# Altium PCB 01LED灯模块.PcbDoc
Units mil, origin at the board's own origin, x right, y up, seen from the top; angles counter-clockwise.
Board outline 1168.96 x 939.58 mil, 2 copper layers (Top Layer, Bottom Layer); 1 components, 6 nets, 9 pads, 27 vias.
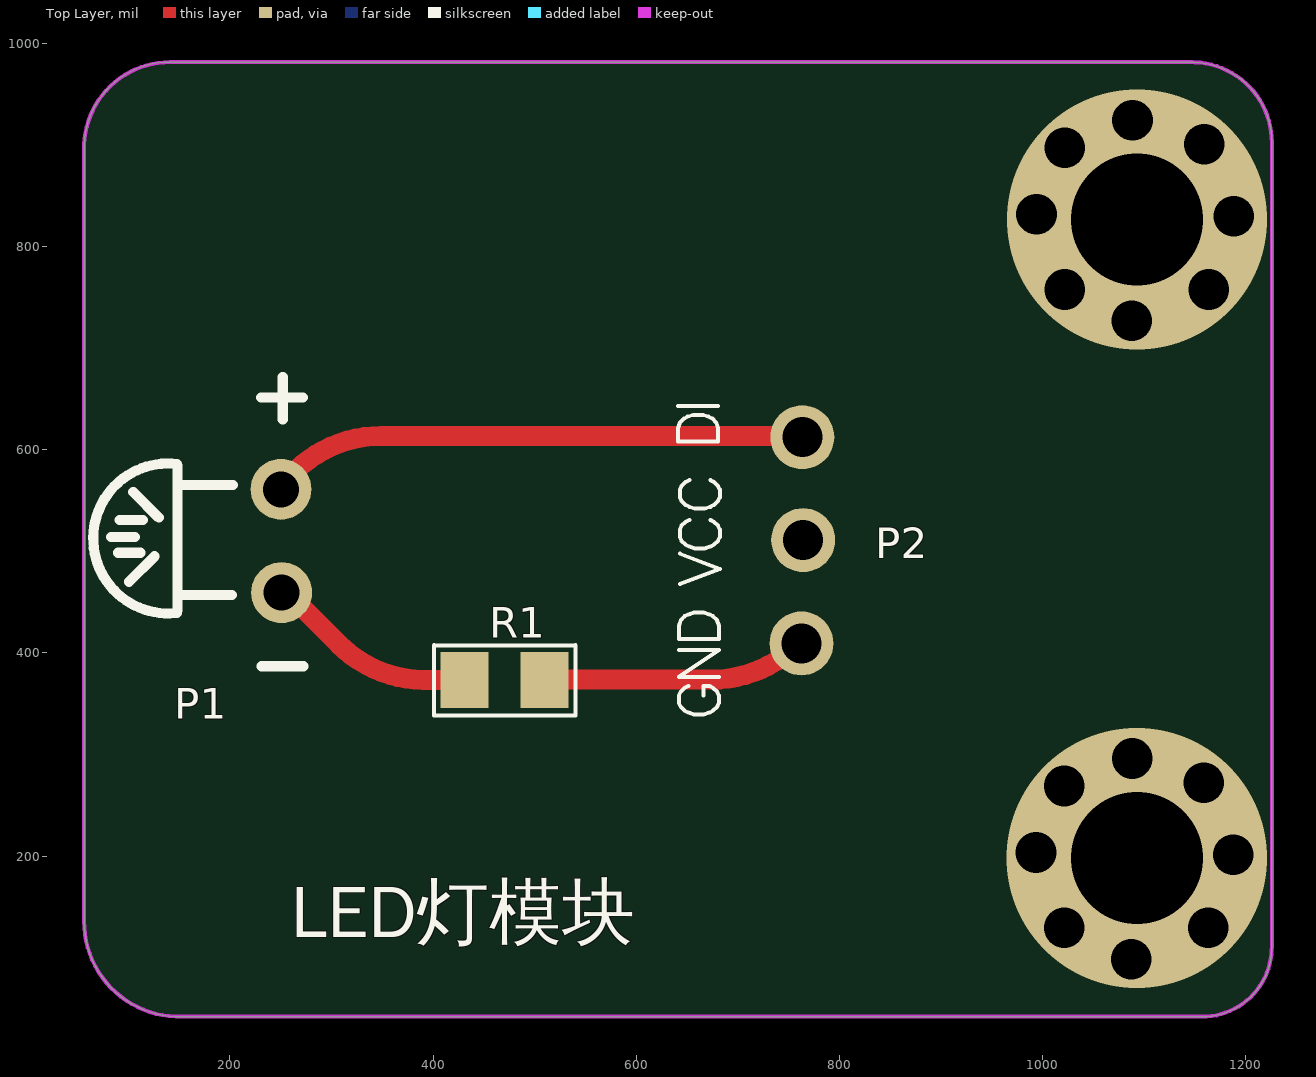
[diagram p0: Top Layer view]
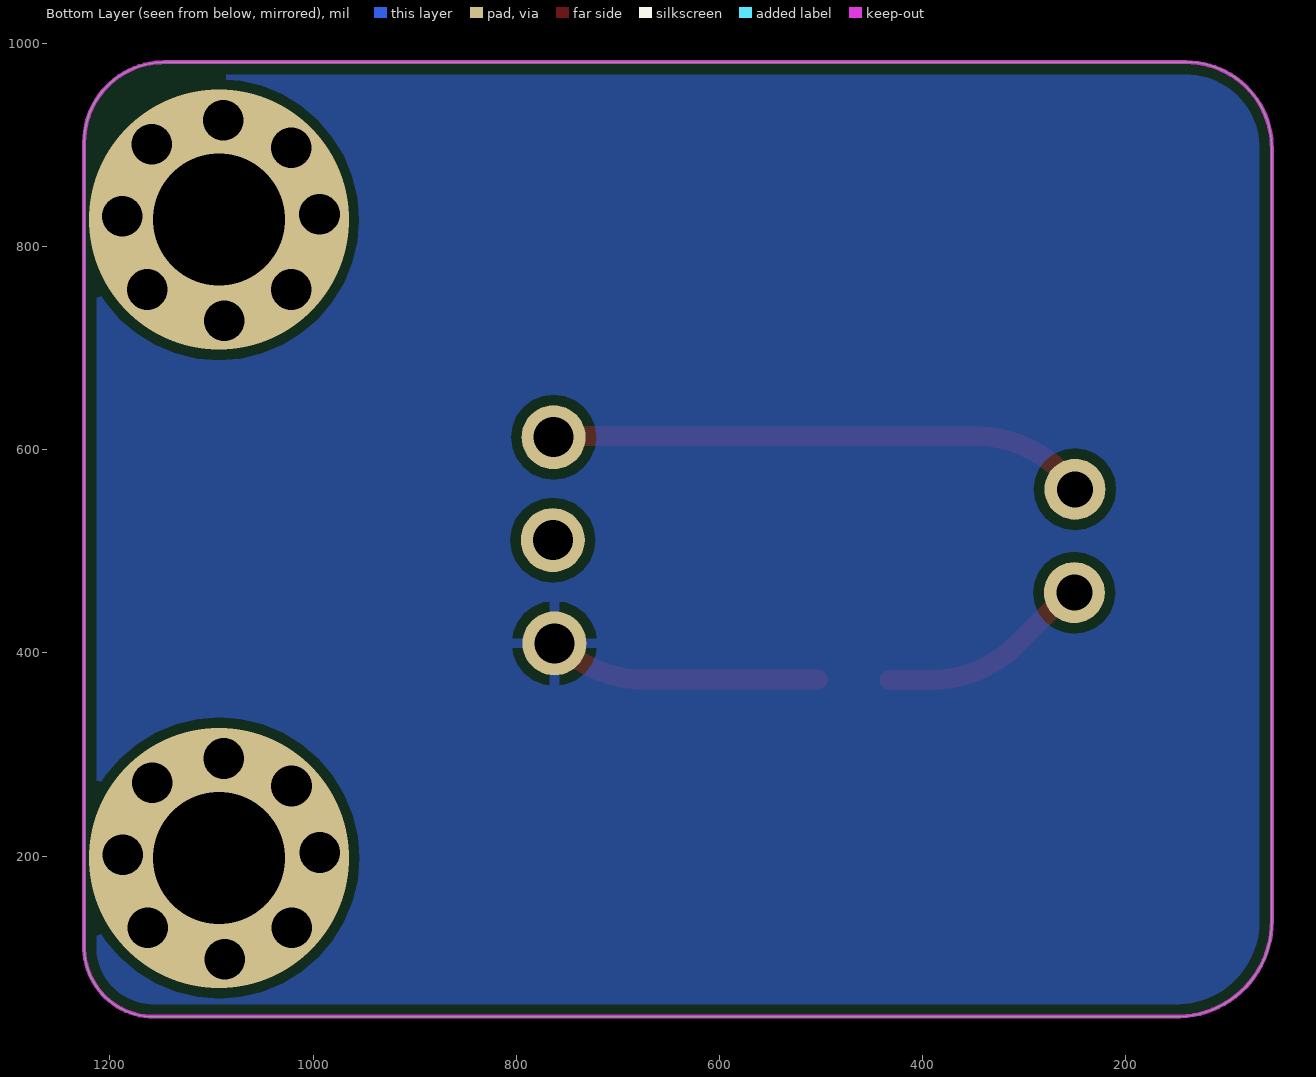
[diagram p1: Bottom Layer view, seen from below]

## Layer stack, top to bottom
Top Solder: solder mask 0.4, Solder Resist, Dk 3.5
Top Layer: signal copper 1.4
Dielectric1: dielectric 12.6, FR-4, Dk 4.8
Bottom Layer: signal copper 1.4
Bottom Solder: solder mask 0.4, Solder Resist, Dk 3.5

## Board outline
70.57,86.17 67.32,91.85 64.47,97.74 62.03,103.82 60.03,110.06 58.47,116.42 57.35,122.87 56.69,129.38 56.48,135.93 56.48,897.32 56.54,900.25 56.97,906.12 57.81,911.95 59.05,917.71 60.69,923.36 62.73,928.88 65.14,934.25 67.92,939.44 71.06,944.42 74.53,949.18 78.33,953.67 82.43,957.89 86.82,961.82 91.47,965.43 96.36,968.7 101.47,971.63 106.77,974.19 112.24,976.38 117.84,978.18 123.56,979.59 129.36,980.59 135.22,981.18 141.1,981.37 140.82,981.34 1146.68,981.34 1146.94,981.26 1149.69,981.2 1155.17,980.8 1160.61,980.02 1165.99,978.86 1171.27,977.32 1176.42,975.43 1181.44,973.17 1186.29,970.58 1190.94,967.65 1195.37,964.4 1199.57,960.86 1203.52,957.02 1207.18,952.93 1210.55,948.58 1213.61,944.02 1216.34,939.25 1218.74,934.3 1220.78,929.19 1222.46,923.96 1223.77,918.62 1224.71,913.2 1225.27,907.73 1225.44,902.24 1225.44,110.16 1225.38,107.76 1225.03,102.98 1224.35,98.24 1223.34,93.56 1222,88.97 1220.35,84.47 1218.39,80.11 1216.13,75.89 1213.58,71.83 1210.75,67.97 1207.66,64.31 1204.32,60.88 1200.75,57.69 1196.97,54.75 1192.99,52.09 1188.84,49.71 1184.53,47.63 1180.08,45.85 1175.52,44.38 1170.88,43.24 1166.16,42.43 1161.4,41.94 1156.61,41.79 1156.84,41.8 149.98,41.8 146.72,41.87 140.18,42.35 133.7,43.28 127.3,44.66 121.01,46.49 114.87,48.75 108.89,51.43 103.12,54.52 97.58,58.01 92.29,61.88 87.29,66.11 82.6,70.67 78.23,75.55 74.22,80.72

## Design rules (kind name [scope] priority, off if disabled: settings)
Clearance CAM_Clearance_2 [OnLayer('Top Layer')] p1: gap=10 ignorepadtopadclearanceinfootprint=FALSE except(0: Arc-Hole Track-Hole SMDPad-Hole THPad-Hole Via-Hole Fill-Hole Poly-Hole Region-Hole Text-Hole)
Clearance CAM_Clearance_1 [OnLayer('Bottom Layer')] p2: gap=10 ignorepadtopadclearanceinfootprint=FALSE except(0: Arc-Hole Track-Hole SMDPad-Hole THPad-Hole Via-Hole Fill-Hole Poly-Hole Region-Hole Text-Hole)
Clearance [All] p3: gap=10 ignorepadtopadclearanceinfootprint=FALSE except(0: Arc-Hole Track-Hole SMDPad-Hole THPad-Hole Via-Hole Fill-Hole Poly-Hole Region-Hole Text-Hole)
PolygonConnect [All] p1: connectstyle=Relief reliefconductorwidth=10 reliefentries=4 polygonreliefangle="90 Angle" airgapwidth=10
RoutingVias [All] p1: holewidth=28 width=50 viastyle="Through Hole" minholewidth=28 minwidth=50 maxholewidth=28 maxwidth=50
SilkToSolderMaskClearance SilkscreenOverComponentPads [IsPad] p1: minsilkscreentomaskgap=10 clearancetoexposedcopper=TRUE
SolderMaskExpansion [All] p1: expansion=4
Width CAM_Width_2 [OnLayer('Top Layer')] p1: maxlimit=20.68 minlimit=18.68 preferedwidth=19.68
Width CAM_Width_1 [OnLayer('Bottom Layer')] p2: maxlimit=11 minlimit=4 preferedwidth=5
Width [All] p3: maxlimit=10 minlimit=10 preferedwidth=10
29 further rules are at their usual default settings.

## Components (designator, comment, footprint, x,y, rotation, side; value= is the part's Value field where it differs from the comment)
R1 "100R 5%" 0805-R 470,373.43 r180 top

## Footprints (in the part's own frame and the unit in brackets; to place one, negate y for a bottom-side part, rotate by r counter-clockwise, add the part's x,y. Pads: shape width x height; smd on the part's side, far side on the other; paste and mask are expansions set on the pad)
0805-R [mm]
  rect 1.2x1.4 smd: 1(-1,0) 2(1,0)
  silkscreen extent -1.78,-0.86 1.75,0.89, body extent -0.97,-0.61 1.03,0.64, height 0.55

## Free pads (board coordinates)
  round 60 hole 35.43: 0(250.24,560.94) 0(250.85,459.26)
  rect 26x39.37 smd paste+0 mask+4: 1(432.53,373.43) 1(504,373.86)
  round 62.99 hole 39.37: 1(762.53,409.29) 1(763.35,612.2) 1(764.19,510.95)

## Via types
v1: diameter 40, hole 40, Top Layer to Bottom Layer, 24 vias
v2: diameter 255.91, hole 129.92, Top Layer to Bottom Layer, 3 vias

## Nets (pads, with @x,y where several pads share a name; then routed paths per layer and width w, separated by ;. In a path a pad name is that pad's centre, name@x,y a point inside that pad or via, vN(x,y) a via of type N, cw(c..) or ccw(c..) an arc to the next point about the centre after c; other vN are vias at no path point)
$Net0: pad.0@250.85,459.26 pad.1@432.53,373.43 R1.2 | length 209.1
  Top Layer w19.68: pad.0@253.78,458.85 253.9,458.85 254.39,458.82 254.88,458.76 255.35,458.67 255.83,458.54 256.29,458.39 256.74,458.19 257.17,457.97 257.59,457.72 257.99,457.44 258.37,457.13 258.73,456.8 306.96,408.57 313.12,402.82 319.67,397.52 326.57,392.69 333.79,388.35 341.3,384.53 349.05,381.23 357.02,378.49 365.16,376.31 373.43,374.7 381.79,373.68 390.2,373.24 392.31,373.22 R1.2@432.94,373.22
$Net1: pad.0@250.24,560.94 pad.1@763.35,612.2 | length 528
  Top Layer w19.68: pad.0@250.85,565.51 263.43,578.09 264.94,579.56 271.2,585.2 277.84,590.39 284.82,595.1 292.12,599.31 299.69,603 307.5,606.16 315.52,608.76 323.69,610.8 331.99,612.27 340.37,613.15 348.79,613.44 pad.1@764.19,613.44
$Net2: pad.1@504,373.86 pad.1@762.53,409.29 R1.1 | length 269.2
  Top Layer w19.68: R1.1@502.94,373.63 673.98,373.63 682.4,373.92 690.78,374.8 699.08,376.27 707.25,378.31 715.27,380.91 723.08,384.07 730.65,387.76 737.95,391.97 744.93,396.68 751.57,401.87 757.83,407.51 759.33,408.99 pad.1@761.69,411.34
$Net3: pad.1@764.19,510.95
$Net4: 
  other v1: 1087.11,98.43 1021.27,129.25 1162.93,129.25 1187.53,201.35 993.36,203.43 1021.28,268.85 1158.36,272.18 1087.93,295.94
  other v2: 1092.52,198
$Net5: 
  other v1: 1087.53,726.77 1087.53,726.77 1021.69,757.59 1021.69,757.59 1163.35,757.59 1163.35,757.59 1187.95,829.68 1187.95,829.68 993.78,831.77 993.78,831.77 1021.7,897.18 1021.7,897.19 1158.78,900.52 1158.78,900.52 1088.35,924.27 1088.35,924.28
  other v2: 1092.94,826.34 1092.94,826.34

## Polygon pours and split planes (outlines as drawn)
$Net2 on Bottom Layer "Top Layer-No Net 4" (solid, remove dead copper, pour order 1000): 40,1030 25,1015 25,35 1260,35 1325,100 1330,105 1330,1035

## Keep-outs
Keep-Out Layer:
  lines w3.94: 56.48,135.62 56.48,897.03 ; 56.48,135.93 56.69,129.38 57.35,122.87 58.47,116.42 60.03,110.06 62.03,103.82 64.47,97.74 67.32,91.85 70.57,86.17 74.22,80.72 78.23,75.55 82.6,70.67 87.29,66.11 92.29,61.88 97.58,58.01 103.12,54.52 108.89,51.43 114.87,48.75 121.01,46.49 127.3,44.66 133.7,43.28 140.18,42.35 146.72,41.87 149.98,41.8 ; 56.48,897.32 56.54,900.25 56.97,906.12 57.81,911.95 59.05,917.71 60.69,923.36 62.73,928.88 65.14,934.25 67.92,939.44 71.06,944.42 74.53,949.18 78.33,953.67 82.43,957.89 86.82,961.82 91.47,965.43 96.36,968.7 101.47,971.63 106.77,974.19 112.24,976.38 117.84,978.18 123.56,979.59 129.36,980.59 135.22,981.18 141.1,981.37 ; 140.82,981.34 1146.68,981.34 ; 150.3,41.8 1156.84,41.8 ; 1146.94,981.26 1149.69,981.2 1155.17,980.8 1160.61,980.02 1165.99,978.86 1171.27,977.32 1176.42,975.43 1181.44,973.17 1186.29,970.58 1190.94,967.65 1195.37,964.4 1199.57,960.86 1203.52,957.02 1207.18,952.93 1210.55,948.58 1213.61,944.02 1216.34,939.25 1218.74,934.3 1220.78,929.19 1222.46,923.96 1223.77,918.62 1224.71,913.2 1225.27,907.73 1225.44,902.24 ; 1156.61,41.79 1161.4,41.94 1166.16,42.43 1170.88,43.24 1175.52,44.38 1180.08,45.85 1184.53,47.63 1188.84,49.71 1192.99,52.09 1196.97,54.75 1200.75,57.69 1204.32,60.88 1207.66,64.31 1210.75,67.97 1213.58,71.83 1216.13,75.89 1218.39,80.11 1220.35,84.47 1222,88.97 1223.34,93.56 1224.35,98.24 1225.03,102.98 1225.38,107.76 1225.44,110.16 ; 1225.44,110.39 1225.44,902.51

## Silkscreen, mask and mechanical layers (free items; w line width, h text height)
Top Overlay:
  lines w3.94: 641.07,643.06 680.44,643.06 ; 641.91,402.61 681.27,402.61 641.91,376.37 681.27,376.37 ; 642.75,467.6 682.11,482.6 642.75,497.59 ; 651.28,367.37 647.53,365.5 643.78,361.75 641.91,358 641.91,350.51 643.78,346.76 647.53,343.01 651.28,341.13 656.9,339.26 666.27,339.26 671.9,341.13 675.65,343.01 679.4,346.76 681.27,350.51 681.27,358 679.4,361.75 675.65,365.5 671.9,367.37 666.27,367.37 666.27,358 ; 652.12,530.77 648.37,528.89 644.63,525.14 642.75,521.4 642.75,513.9 644.63,510.15 648.37,506.4 652.12,504.53 657.75,502.65 667.12,502.65 672.74,504.53 676.49,506.4 680.24,510.15 682.11,513.9 682.11,521.4 680.24,525.14 676.49,528.89 672.74,530.77 ; 652.12,569.94 648.37,568.07 644.63,564.32 642.75,560.57 642.75,553.07 644.63,549.32 648.37,545.58 652.12,543.7 657.75,541.83 667.12,541.83 672.74,543.7 676.49,545.58 680.24,549.32 682.11,553.07 682.11,560.57 680.24,564.32 676.49,568.07 672.74,569.94 ; 641.07,608.01 641.07,621.13 642.95,626.75 646.7,630.5 650.45,632.38 656.07,634.25 665.44,634.25 671.06,632.38 674.81,630.5 678.56,626.75 680.44,621.13 680.44,608.01 641.07,608.01 ; 641.91,413.48 641.91,426.6 643.78,432.23 647.53,435.98 651.28,437.85 656.9,439.73 666.27,439.73 671.9,437.85 675.65,435.98 679.4,432.23 681.27,426.6 681.27,413.48 641.91,413.48
  lines w10: 82.93,514.04 106.26,514.04 ; 89.82,498.42 111.68,498.42 ; 91.26,530.73 114.18,530.73 ; 100.62,469.88 125.83,495.09 ; 104.8,558.23 130.01,533.02 ; 147.88,439.27 146.05,439.06 140.9,438.77 135.75,438.84 130.61,439.26 125.52,440.04 120.49,441.18 115.55,442.66 110.73,444.48 106.05,446.64 101.53,449.12 97.2,451.9 93.07,454.99 89.16,458.35 85.5,461.98 82.1,465.85 78.98,469.95 76.15,474.26 73.63,478.76 71.43,483.42 69.56,488.22 68.03,493.14 66.85,498.16 66.02,503.24 65.54,508.37 65.43,513.53 65.67,518.68 66.28,523.79 67.24,528.86 68.55,533.84 70.2,538.72 72.19,543.48 74.51,548.08 77.14,552.51 80.08,556.75 83.3,560.77 86.8,564.55 90.55,568.09 94.54,571.35 98.75,574.32 103.16,577 107.74,579.36 112.47,581.4 117.34,583.1 122.31,584.46 127.36,585.46 132.47,586.12 137.62,586.41 142.77,586.34 147.91,585.92 ; 148.25,441.54 148.25,458.12 ; 148.25,584.04 148.25,565.3 ; 202,456.87 148.25,456.87 148.25,565.3 ; 202.83,565.3 148.25,565.3 ; 230.45,651.33 271.99,651.33 ; 230.98,386.76 272.52,386.76 ; 251.91,629.7 251.91,671.24
  text "P2" at 835,493.14 h30
  text "P1" at 145,335 h30
  text "LED灯模块" at 260,102.98 h90